# Altium PCB placa_adquisicion_ecg.PcbDoc
Units mm, origin at the board's own origin, x right, y up, seen from the top; angles counter-clockwise.
Board outline 152.4 x 101.6 mm, 2 copper layers (Top Layer, Bottom Layer); 45 components, 30 nets, 134 pads, 29 vias.
Unrouted connection lines stored in the file: 12.
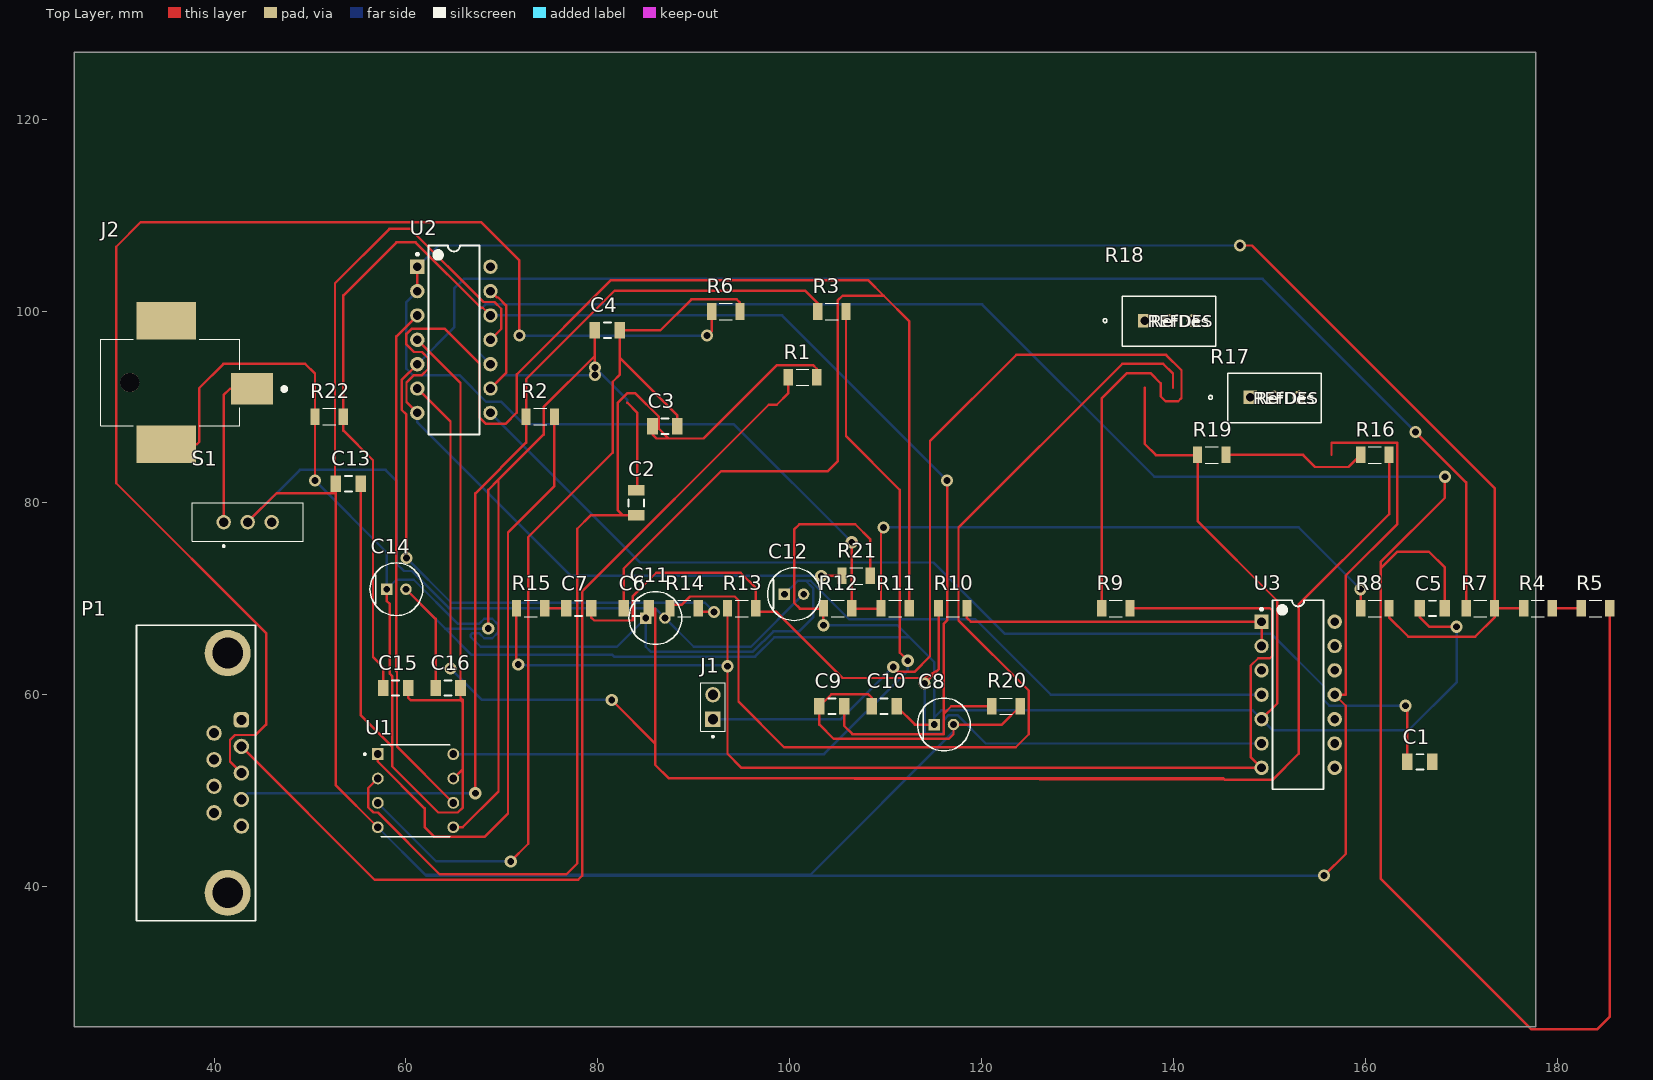
[diagram p0: Top Layer view]
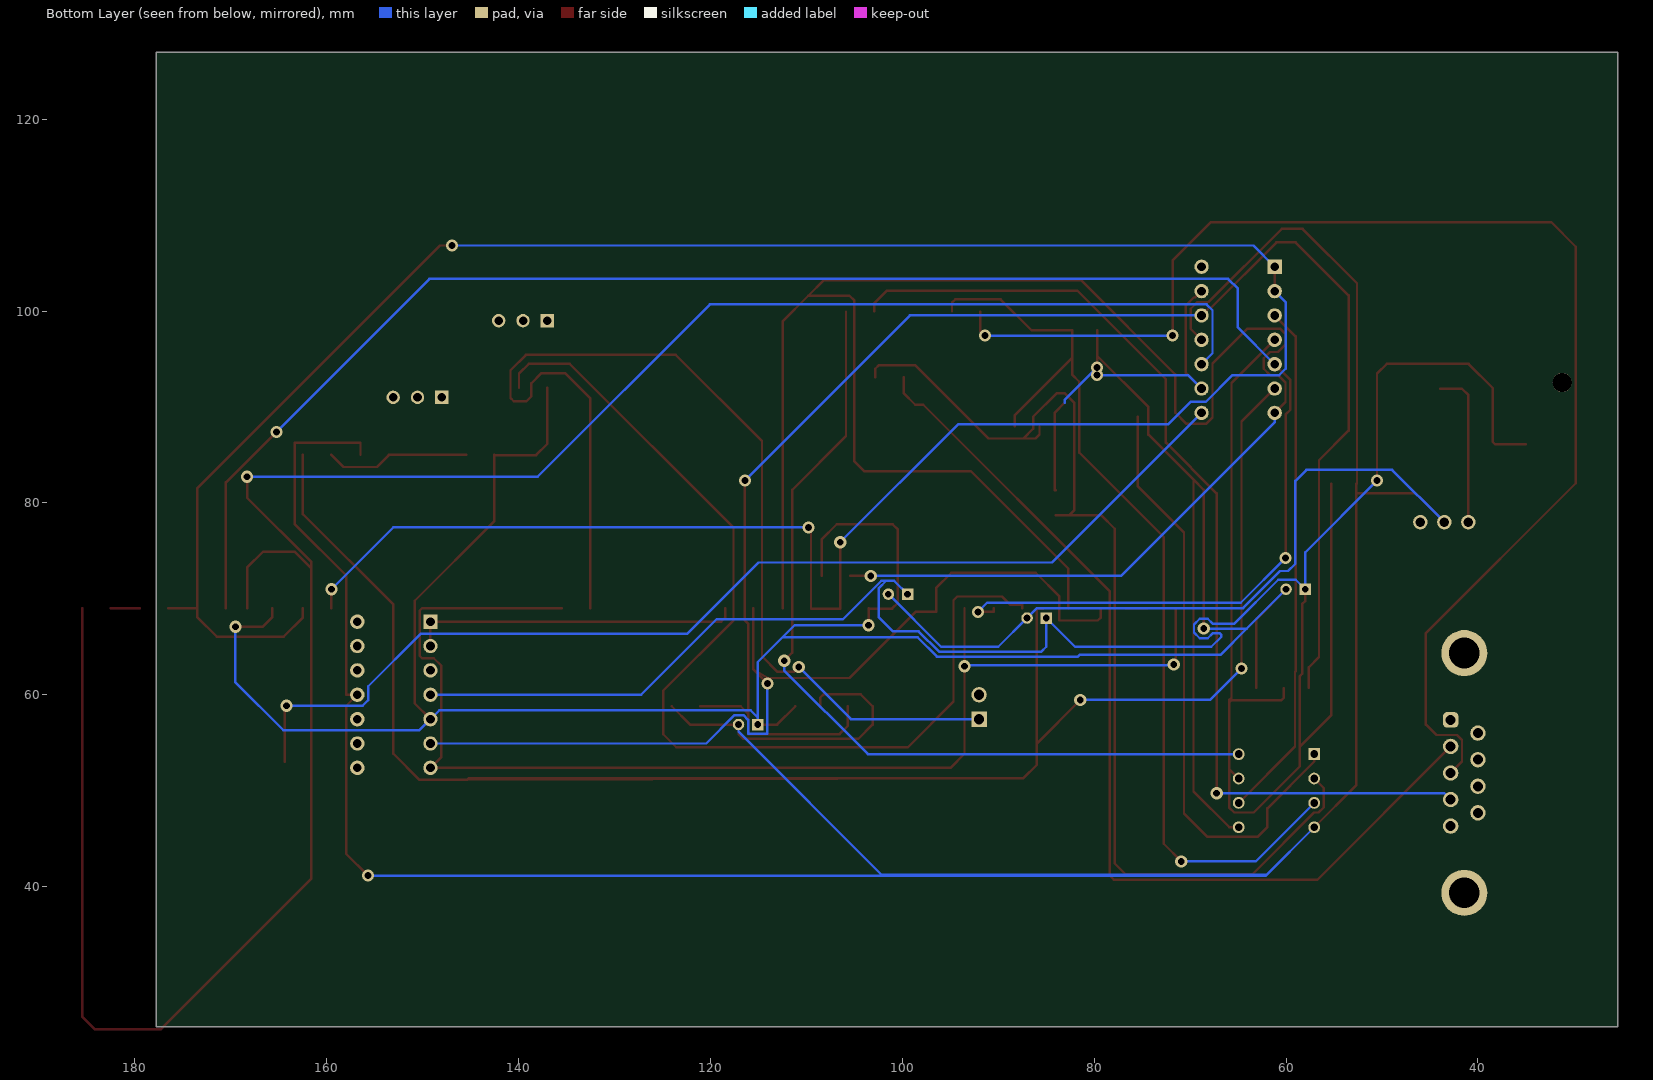
[diagram p1: Bottom Layer view, seen from below]
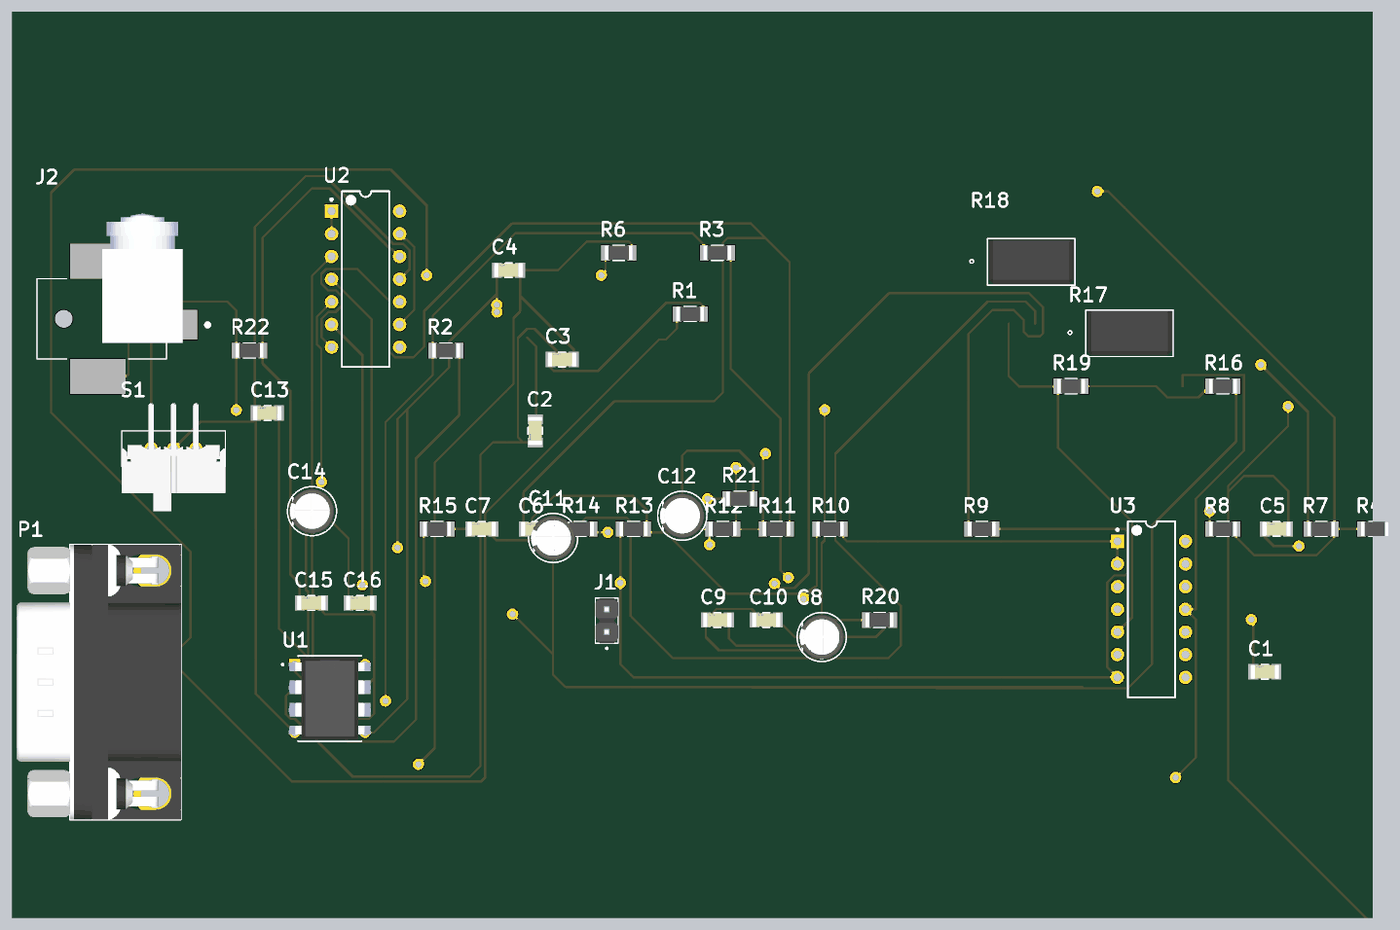
[diagram p2: 3D render of the assembled board from above, using the file's embedded part models]

## Layer stack, top to bottom
Top Solder: solder mask 0.0102, Solder Resist, Dk 3.5
Top Layer: signal copper 0.0356
Dielectric 1: dielectric 0.32, FR-4, Dk 4.8
Bottom Layer: signal copper 0.0356
Bottom Solder: solder mask 0.0102, Solder Resist, Dk 3.5

## Board outline
25.4,25.4 177.8,25.4 177.8,127 25.4,127

## Design rules (kind name [scope] priority, off if disabled: settings)
Clearance [All] p1: gap=0.254 ignorepadtopadclearanceinfootprint=FALSE except(0: Arc-Hole Track-Hole SMDPad-Hole THPad-Hole Via-Hole Fill-Hole Poly-Hole Region-Hole Text-Hole)
PolygonConnect [All] p1: connectstyle=Relief reliefconductorwidth=0.254 reliefentries=4 polygonreliefangle="90 Angle" airgapwidth=0.254
RoutingVias [All] p1: holewidth=0.711 width=1.27 viastyle="Through Hole" minholewidth=0.711 minwidth=1.27 maxholewidth=0.711 maxwidth=1.27
SolderMaskExpansion [All] p1: expansion=0.102 istentingtop=FALSE
Width [All] p1: maxlimit=0.7 minlimit=0.254 preferedwidth=0.6 toplayer_minwidth=0.5 bottomlayer_maxwidth=0.254 bottomlayer_prefwidth=0.254 minimp=50.000000 maximp=50.000000 favimp=50.000000
30 further rules are at their usual default settings.

## Components (designator, comment, footprint, x,y, rotation, side; value= is the part's Value field where it differs from the comment)
C1 "1 nF" C_1206_50V 165.699,53 r0 top value="100 pF"
C2 "100 pF" C_1206_50V 84,80 r90 top
C3 "4.7 nF" C_1206_50V 87,88 r0 top value="100 pF"
C4 "100 pF" C_1206_50V 81,98 r0 top
C5 "1 nF" C_1206_50V 167,69 r0 top value="100 pF"
C6 "4.7 nF" C_1206_50V 84,69 r0 top value="100 pF"
C7 "2 nF" C_1206_50V 78,69 r0 top value="100 pF"
C8 "10 uF 10V" C_DIP_100uF_16V 116.076,56.896 r0 top
C9 "100 nF 50V" C_1206_50V 104.392,58.801 r0 top value="100 pF"
C10 "100 nF 50V" C_1206_50V 109.853,58.801 r0 top value="100 pF"
C11 "100 uF 16V" C_DIP_100uF_16V 86,68 r0 top
C12 "100 uF 16V" C_DIP_100uF_16V 100.455,70.485 r0 top
C13 "100 nF 50V" C_1206_50V 54,82 r0 top value="100 pF"
C14 "10 uF 50V" C_DIP_100uF_16V 59,71 r0 top
C15 "100 nF 50V" C_1206_50V 58.926,60.706 r0 top value="100 pF"
C16 "100 nF 50V" C_1206_50V 64.387,60.706 r0 top value="100 pF"
J1 "M_HEADER_2" M_HEADER_2 92,58.73 r90 top
J2 "SMT_JACK_HEMBRA" SMT_JACK_HEMBRA 43.95,91.9 r0 top
P1 "618009231221" DIP_DB9M_90DEG 38.12,51.845 r270 top
R1 "100k" R_1206_0.25W 101.344,93.091 r0 top
R2 "1k" R_1206_0.25W 74,89 r0 top
R3 "1k" R_1206_0.25W 104.392,99.949 r0 top
R4 "1k" R_1206_0.25W 178,69 r0 top
R5 "1k" R_1206_0.25W 184,69 r0 top
R6 "100k" R_1206_0.25W 93.343,99.949 r0 top
R7 "100k" R_1206_0.25W 172,69 r0 top
R8 "100k" R_1206_0.25W 161,69 r0 top
R9 "100k" R_1206_0.25W 134,69 r0 top
R10 "10k" R_1206_0.25W 117,69 r0 top
R11 "10k" R_1206_0.25W 111,69 r0 top
R12 "10k" R_1206_0.25W 105,69 r0 top
R13 "10M" R_1206_0.25W 95,69 r0 top
R14 "1k" R_1206_0.25W 89,69 r0 top
R15 "10k" R_1206_0.25W 73,69 r0 top
R16 "1M" R_1206_0.25W 161,85 r0 top
R17 "100k" POT_TRIMMER 148,91 r0 top
R18 "10k" POT_TRIMMER 137,99 r0 top
R19 "1M" R_1206_0.25W 144,85 r0 top
R20 "100k 0.25W" R_1206_0.25W 122.553,58.801 r0 top
R21 "1k 0.25W" R_1206_0.25W 106.932,72.39 r0 top
R22 "100k 0.25W" R_1206_0.25W 52,89 r0 top
S1 "DIP_SWITCH_EG1218" DIP_SWITCH_EG128 43.5,78 r0 top
U1 "DIP_AD620AN" DIP_AD620AN 61,50 r0 top
U2 "TL084CN" DIP_TL084CN 65,97 r0 top
U3 "TL084CN" DIP_TL084CN 153,60 r0 top

## Footprints (in the part's own frame and the unit in brackets; to place one, negate y for a bottom-side part, rotate by r counter-clockwise, add the part's x,y. Pads: shape width x height; smd on the part's side, far side on the other; paste and mask are expansions set on the pad)
C_1206_50V [mm]
  rect 1.105x1.706 smd paste+0 mask+0: 1(-1.301,0) 2(1.301,0)
  silkscreen extent -0.37,-0.8 0.37,0.8, body extent -1.95,-1 1.95,1, height 0.25
C_DIP_100uF_16V [mm]
  rect 1.2x1.2 hole 0.7 paste-1000 mask+0: 1(-1,0)
  round 1.2 hole 0.7 paste-1000 mask+0: 2(1,0)
  silkscreen extent -2.75,-2.75 2.75,2.75, body extent -2.85,-2.85 2.85,2.85, height 0.25
DIP_AD620AN [mm]
  rect 1.23x1.23 hole 0.82: 1(-3.935,3.81)
  round 1.23 hole 0.82: 2(-3.935,1.27) 3(-3.935,-1.27) 4(-3.935,-3.81) 5(3.935,-3.81) 6(3.935,-1.27) 7(3.935,1.27) 8(3.935,3.81)
  silkscreen extent -5.38,-4.8 3.56,4.8, body extent -5.46,-4.64 5.46,4.64, height 5.33
DIP_DB9M_90DEG [mm] "9 pins, right angled, 8.08mm, with hex screw"
  rrect50% 1.6x1.6 hole 1.04: 1(-5.54,4.72)
  round 1.6 hole 1.04: 2(-2.77,4.72) 3(0,4.72) 4(2.77,4.72) 5(5.54,4.72) 6(-4.155,1.88) 7(-1.385,1.88) 8(1.385,1.88) 9(4.155,1.88)
  round 4.8 hole 3.2: M1(-12.5,3.3) M2(12.5,3.3)
  silkscreen extent -15.4,-6.2 15.4,6.2, body extent -15.4,-12.2 15.4,6.2, height 12.57
DIP_SWITCH_EG128 [mm]
  round 1.508 hole 1: 1(-2.5,0) 2(0,0) 3(2.5,0)
  silkscreen extent -5.8,-2.6 5.8,2, body extent -5.8,-7 5.8,5.1, height 2
DIP_TL084CN [mm] "DIP, 14-Leads, Body 19.7x6.6mm, Pitch 2.54mm"
  rect 1.5x1.5 hole 0.9: 1(-3.81,7.62)
  round 1.5 hole 0.9: 2(-3.81,5.08) 3(-3.81,2.54) 4(-3.81,0) 5(-3.81,-2.54) 6(-3.81,-5.08) 7(-3.81,-7.62) 8(3.81,-7.62) 9(3.81,-5.08) 10(3.81,-2.54) 11(3.81,0) 12(3.81,2.54) 13(3.81,5.08) 14(3.81,7.62)
  silkscreen extent -3.93,-9.85 2.65,9.85, body extent -3.95,-9.85 3.95,9.85, height 5.08
M_HEADER_2 [mm]
  rect 1.605x1.605 / inner round 1.605 / far side rect 1.605x1.605 hole 1.07: 1(-1.27,0)
  round 1.605 hole 1.07: 2(1.27,0)
  silkscreen extent -3.2,-1.27 2.54,1.27, body extent -2.54,-1.27 2.54,1.27, height 8.74
POT_TRIMMER [mil]
  rect 55x55 / inner round 60 / far side rect 55x55 hole 35 paste-27.5 mask+0: 1(0,0)
  round 55 / inner round 60 / far side round 55 hole 35 paste-27.5 mask+0: 2(100,0) 3(200,0)
  silkscreen extent -170,-105 292,100, body extent -87,-100 287,95, height 455
R_1206_0.25W [mm]
  rect 0.97x1.73 smd: 1(-1.48,0) 2(1.48,0)
  silkscreen extent -0.67,-0.85 0.67,0.85, body extent -1.55,-0.8 1.55,0.8, height 0.65
SMT_JACK_HEMBRA [mm]
  rect 4.4x3.3 smd: 1(0,0)
  rect 6.2x3.9 smd: 2(-8.95,7.1) 3(-8.95,-5.8)
  round 2 hole 2 unplated: ""(-12.75,0.65)
  silkscreen extent -15.75,-3.85 3.56,5.15, body extent -11.54,-2.03 3.66,15.07, height 4.5

## Part data
C1 C3 C5 C6 C7 C9 C10 C13 C15 C16: library part C_1206_50V, "Multilayer Ceramic Capacitor, C Series, 100 Pf, - 5%, C0g / Np0, 50 V, 1206 [3216 Metric]", Capacitance="100 pF", Manufacturer=KEMET, Manufacturer Part Number=C1206C101J5GACTU, Package=C1206C-EB, Temperature="-55°C to +150°C", Temperature Characteristic=C0G, Temperature Coefficient=15%, Temperature Range High=+150°C, Temperature Range Low=-55°C, Tolerance=0.05, Voltage Rating="50 V", Automotive=Yes, Automotive Grade="Grade 0", Category=Cap, ComponentLink2Description=Datasheet, ComponentLink2URL=https://content.kemet.com/datasheets/KEM_C1007_X8R_ULTRA_150C_SMD.pdf, Device Class L1="Passive Components", Device Class L2=Capacitors, Device Class L3="Ceramic Capacitors", Digikey Description="Multilayer Ceramic Capacitor, C Series, 100 Pf, - 5%, C0g / Np0, 50 V, 1206 [3216 Metric]", Height=0.88mm, Ipc Land Pattern Name=CAPC320160X78, Lead Free=Yes, Material=Ceramic, Mouser Description="Multilayer Ceramic Capacitors MLCC - SMD/SMT 50volts 100pF C0G 5%", Octopart=https://octopart.com/c1206c101j5gactu-kemet-102340, RoHS=TRUE
C2 C4: library part C_1206_50V, "Multilayer Ceramic Capacitor, C Series, 100 Pf, - 5%, C0g / Np0, 50 V, 1206 [3216 Metric]", Manufacturer=KEMET, Manufacturer Part Number=C1206C101J5GACTU, Package=C1206C-EB, Temperature="-55°C to +150°C", Temperature Characteristic=C0G, Temperature Coefficient=15%, Temperature Range High=+150°C, Temperature Range Low=-55°C, Tolerance=0.05, Voltage Rating="50 V", Automotive=Yes, Automotive Grade="Grade 0", Capacitance="100 pF", Category=Cap, ComponentLink2Description=Datasheet, ComponentLink2URL=https://content.kemet.com/datasheets/KEM_C1007_X8R_ULTRA_150C_SMD.pdf, Device Class L1="Passive Components", Device Class L2=Capacitors, Device Class L3="Ceramic Capacitors", Digikey Description="Multilayer Ceramic Capacitor, C Series, 100 Pf, - 5%, C0g / Np0, 50 V, 1206 [3216 Metric]", Height=0.88mm, Ipc Land Pattern Name=CAPC320160X78, Lead Free=Yes, Material=Ceramic, Mouser Description="Multilayer Ceramic Capacitors MLCC - SMD/SMT 50volts 100pF C0G 5%", Octopart=https://octopart.com/c1206c101j5gactu-kemet-102340, RoHS=TRUE
C8 C11 C12 C14: library part C_DIP_100uF_16V, "Aluminum Electrolytic Capacitors (Radial Lead Type) AEC-Q200 Qualified 100uF ±20% 16V", Capacitance=100uF, Case/Package=Radial, Max Operating Temperature=105°C, Min Operating Temperature=-55°C, Package Quantity=200, Ripple Current=110mA, Tolerance=20%, Voltage=16V, Construction=RADIAL, Diameter=5mm, Height=11mm, Height - Seated (Max)=0.492inch, Lead Diameter=0.5mm, Lead Free="Lead Free", Lead Pitch=2.5mm, Lead/Base Style=Straight, Length=11mm, Life (Hours)=1000Hour, Mount="Through Hole", Number of Pins=2, Packaging=Bulk, Polarity=Polar, REACH SVHC="No SVHC", Ripple Current (AC)=110mA, RoHS Compliant=Yes, Series=HD, Termination=Radial, Voltage Rating=16V, Voltage Rating (DC)=16V
J1: "2.54mm (0.1) Pitch SIL Vertical Throughboard Pin Header, 6.1mm mating pin height, tin, 2 contacts", Package=None, Check_prices=https://www.snapeda.com/parts/M20-9990246/Harwin/view-part/?ref=eda, MF=Harwin, MP=M20-9990246, SnapEDA_Link=https://www.snapeda.com/parts/M20-9990246/Harwin/view-part/?ref=snap
J2: "2.0 x 6.3 mm, 5.0 A, Horizontal, Surface Mount (SMT), Dc Power Jack Connector", Package=None, Check_prices=https://www.snapeda.com/parts/PJ-036AH-SMT-TR/Same+Sky/view-part/?ref=eda, MF="Same Sky", MP=PJ-036AH-SMT-TR, SnapEDA_Link=https://www.snapeda.com/parts/PJ-036AH-SMT-TR/Same+Sky/view-part/?ref=snap
P1: library part DIP_DB9M_90DEG, Contact Resistance=30mΩ, Current Rating=3A, Insulation Resistance=5GΩ, Max Operating Temperature=105°C, Min Operating Temperature=-55°C, Operating Supply Voltage=125V, Contact Material=Gold, Contact Plating=Gold, Depth=18.5mm, Gender=Male, Height=12.7mm, Housing Material=Steel, Insulation Material=PBT, Length=30.8mm, Mount="Through Hole", NexarPartId=22865742, Number of Contacts=9, Number of Pins=9, Number of Rows=2, Orientation="Right Angle", Pitch=2.77mm, REACH SVHC=Unknown, RoHS=Compliant, Termination=SMD/SMT, Voltage Rating=125V, Width=12.5mm
R1 R2 R3 R4 R5 R6 R7 R8 R9 R10 R11 R12 R13 R14 R15 R16 R19 R20 R21 R22: library part R_1206_0.25W, "10 kOhms Â±1% 0.25W, 1/4W Chip Resistor 1206 (3216 Metric) Moisture Resistant Thick Film", Package="3116 Yageo", Availability="In Stock", Check_prices=https://www.snapeda.com/parts/RC1206FR-0710KL/Yageo/view-part/?ref=eda, MF=Yageo, MP=RC1206FR-0710KL, Price=None, Purchase-URL=https://pricing.snapeda.com/search?q=RC1206FR-0710KL&ref=eda, SnapEDA_Link=https://www.snapeda.com/parts/RC1206FR-0710KL/Yageo/view-part/?ref=snap
R17 R18: library part POT_TRIMMER, "Description", Manufacturer_Name="Bourns Electronics", Manufacturer_Part_Number=PV36W104C01B00, Copyright="Copyright (C) 2025 Ultra Librarian. All rights reserved.", Type="Trimmer Potentiometers"
S1: library part DIP_SWITCH_EG128, "Slide Switch, EG Series, SPDT, Non-Shorting, ON-ON, 200mA DC, 30VDC, PC Pin", Package=None, Check_prices=https://www.snapeda.com/parts/EG1218/E-Switch/view-part/?ref=eda, MF=E-Switch, MP=EG1218, SnapEDA_Link=https://www.snapeda.com/parts/EG1218/E-Switch/view-part/?ref=snap
U1: "Instrumentation Amplifier 1 Circuit - 8-PDIP", Package="PDIP-8 Linear Technology", Availability="In Stock", Check_prices=https://www.snapeda.com/parts/AD620AN/Analog+Devices+Inc./view-part/?ref=eda, MF="Analog Devices", MP=AD620AN, Price=None, Purchase-URL=https://pricing.snapeda.com/search/part/AD620AN/?ref=eda, SnapEDA_Link=https://www.snapeda.com/parts/AD620AN/Analog+Devices+Inc./view-part/?ref=snap
U2 U3: library part DIP_TL084CN, "JFET-Input Operational Amplifier, 7 to 36 V, 0 to 70 degC, 14-pin DIP (N14), Pb-Free (RoHS)", Manufacturer="Texas Instruments", Rating=Catalog, Total Supply Voltage(Max)(+5V is 5, +/-5V is 10)=36, Total Supply Voltage(Min)(+5V is 5, +/-5V is 10)=7, CMRR(Min)(dB)=70, Code_JEDEC=MS-001, ComponentLink1Description="Manufacturer URL", ComponentLink1URL=http://www.ti.com/, ComponentLink2Description=Datasheet, ComponentLink2URL=http://www.ti.com/lit/ds/symlink/tl084.pdf, ComponentLink3Description="Package Specification", ComponentLink3URL=http://www.ti.com/lit/ml/mpdi002c/mpdi002c.pdf, DatasheetVersion=SLOS081G, Eco-Plan="Pb-Free (RoHS)", GBW(Typ)(MHz)=3, IIB(Max)(pA)=400, Iq per channel(Max)(mA)=2.8, Mounting Technology="Through Hole", Number of Channels=4, Offset Drift(Typ)(uV/C)=18, PackageDescription="14-Pin Plastic In-Line, Body 19.305 x 6.35 mm, Pitch 2.54 mm", PackageReference=N0014A, PackageVersion="4040049/E, 12/2002", PartNumber=TL084CN, Slew Rate(Typ)(V/us)=13, Sub Family="General Purpose Amplifier, High Supply Voltage Amplifier (>=30V)", Vio (25C)(Max)(mV)=15, Vn at 1kHz(Typ)(nV/rtHz)=18

## Via types
v1: diameter 1.27, hole 0.711, Top Layer to Bottom Layer, 29 vias

## Nets (pads, with @x,y where several pads share a name; then routed paths per layer and width w, separated by ;. In a path a pad name is that pad's centre, name@x,y a point inside that pad or via, vN(x,y) a via of type N, cw(c..) or ccw(c..) an arc to the next point about the centre after c; other vN are vias at no path point)
+5: C8.2 C9.1 C10.1 C11.2 C12.2 C13.1 R17.2 R20.2 S1.2 U1.4 U2.4 U3.11 | length 424.3
  Top Layer w0.254: S1.2 46.526,81.026 52.699,81.026 ; U1.4 52.699,50.556 52.699,81.026 ; 68.81,97 69.941,98.131 69.941,100.239 69.24,100.94 68.072,100.94 60.452,108.56 58.268,108.56 52.603,102.895 52.603,82 C13.1 52.699,81.026 ; C10.1 108.552,59.697 108.204,60.046 104.336,60.046 C9.1 103.091,56.896 104.59,55.397 116.586,55.397 117.076,55.887 C8.2 122.128,56.896 R20.2 ; v1(155.702,41.148) 157.963,43.409 157.963,58.848 U3.11 157.963,60 157.963,72.415 163.347,77.8 163.347,86.258 156.48,86.258 156.48,85
  Bottom Layer w0.254: S1.2 48.939,83.439 57.887,83.439 59.03,82.296 59.03,73.66 59.792,72.898 60.613,72.898 64.474,69.037 85.963,69.037 C11.2 90,65 95.97,65 C12.2 ; U1.4 62.031,41.224 ; C8.2 117.076,56.151 102.149,41.224 62.031,41.224 ; v1(155.702,41.148) 62.107,41.148 62.031,41.224
-5: C11.1 C12.1 C13.2 C14.1 C15.2 C16.2 J2.3 R22.1 U1.7 U2.11 U3.4 | length 286.9
  Top Layer w0.254: J2.3 38.196,86.1 38.456,86.36 38.456,91.973 40.97,94.488 49.504,94.488 50.52,93.472 R22.1 v1(50.52,82.322) ; C13.2 55.301,57.856 58.547,54.61 58.547,52.553 58.559,52.541 ; C14.1 58,69.762 58.318,69.444 58.318,62.191 58.559,61.951 58.559,52.541 ; C15.2 60.227,59.69 60.481,59.436 65.688,59.436 ; 61.19,97 65.688,92.502 C16.2 65.688,59.687 ; U1.7 65.938,52.273 ; 58.559,52.541 63.373,47.727 65.405,47.727 65.938,48.26 65.938,52.273 ; 65.688,59.436 65.688,59.687 ; 65.688,59.436 65.938,59.185 ; 65.688,59.687 65.938,59.436 65.938,59.185 ; 65.938,52.273 65.938,59.185
  Bottom Layer w0.254: v1(50.52,82.322) 58,74.842 C14.1 58.984,71.984 60.809,71.984 65.381,67.412 67.651,67.412 68.159,67.92 69.001,67.92 69.596,67.324 69.596,66.483 69.001,65.888 68.159,65.888 67.651,66.396 66.905,66.396 66.756,66.247 66.756,66.036 67.792,65 82,65 C11.1 85,65 85.508,64.492 96.18,64.492 98.299,66.611 100.977,66.611 102.438,68.072 102.438,71.12 101.676,71.882 ; C12.1 100.852,71.882 101.676,71.882 ; U3.4 127.223,60 119.355,67.869 106.197,67.869 102.184,71.882 101.676,71.882
GND: C2.2 C4.1 C5.1 C8.1 C10.2 C14.2 C16.1 R12.1 R18.1 R19.1 R21.2 U1.5 U2.9 U2.13 U3.5 | length 348.4
  Top Layer w0.254: C14.2 63.086,67.914 C16.1 ; U1.5 65.913,46.19 69.647,49.924 69.647,82.423 ; v1(68.58,66.904) 68.58,81.356 69.647,82.423 ; U2.9 70.449,93.559 70.449,100.584 69.621,101.412 69.478,101.412 U2.13 ; C4.1 79.699,95.346 ; v1(79.705,93.32) 79.699,93.326 v1(79.699,94.113) 79.699,95.346 ; 83.083,90.438 84.099,89.422 84.099,81.301 C2.2 ; v1(103.52,67.244) R12.1@103.52,68.986 ; R12.1 R12.1@103.52,68.986 ; R21.2 108.412,76.2 106.837,77.775 101.016,77.775 100.457,77.216 100.457,69.596 101.067,68.986 R12.1@103.52,68.986 ; C10.2 113.059,56.896 C8.1 ; 137,92 137,86.164 138.176,84.988 R19.1@142.52,84.988 ; R19.1 R19.1@142.52,84.988 ; U3.5 150.829,59.099 150.829,69.795 142.52,78.104 R19.1@142.52,84.988 ; C5.1 165.699,68.072 166.69,67.081 v1(169.52,67.081) ; 69.647,82.423 74.346,87.122 74.346,89.992 79.699,95.346
  Bottom Layer w0.254: C14.2 64.096,66.904 ; v1(68.58,66.904) 64.096,66.904 ; U2.9 70.21,93.32 v1(79.705,93.32) ; v1(79.699,94.113) 83.083,90.729 83.083,90.438 ; v1(103.52,67.244) 111.242,67.244 112.486,66 ; C8.1 115.076,57.637 ; v1(169.52,67.081) 169.52,61.29 164.541,56.312 150.338,56.312 U3.5 148.265,58.385 115.824,58.385 115.076,57.637 ; 64.096,66.904 66.84,64.16 81.527,64.16 81.703,63.984 96.391,63.984 98.407,66 112.486,66 ; 112.486,66 115.076,63.41 115.076,57.637
NetC1_1: C1.1 U2.8 | length 114.8
  Top Layer w0.254: v1(164.186,58.852) 164.398,58.639 C1.1
  Bottom Layer w0.254: U2.8 84.403,73.787 115.011,73.787 122.453,66.345 150.216,66.345 155.677,60.884 155.677,59.436 156.261,58.852 v1(164.186,58.852)
NetC1_2: C1.2 R4.2 R5.1 | length 3
  Top Layer w0.254: R4.2 R5.1
NetC2_1: C2.1 C3.1 R1.2 U1.2 | length 112.9
  Top Layer w0.254: U1.2 56.069,50.274 56.069,48.26 56.602,47.727 57.074,47.727 63.525,41.275 76.708,41.275 77.86,42.427 77.86,77.311 79.248,78.699 82.616,78.699 ; C2.1 82.616,78.699 ; C3.1 85.699,87.122 86.106,86.716 87.376,86.716 ; R1.2 102.824,93.98 102.443,94.361 98.679,94.361 91.034,86.716 87.376,86.716 ; 82.616,78.699 82.067,79.248 82.067,90.424 83.083,91.44 83.896,91.44 86.36,88.976 86.36,87.732 87.376,86.716
NetC3_2: C3.2 C4.2 R6.2 U1.3 | length 101
  Top Layer w0.254: v1(70.917,42.634) 72.746,44.463 72.746,76.429 81.559,85.242 81.559,92.634 82.301,93.375 82.301,95.123 ; C4.2 C4.2@82.301,97.993 ; C3.2 88.301,89.123 82.301,95.123 ; R6.2 94.823,100.884 94.488,101.219 89.764,101.219 86.538,97.993 C4.2@82.301,97.993 ; 82.301,95.123 C4.2@82.301,97.993
  Bottom Layer w0.254: U1.3 63.161,42.634 v1(70.917,42.634)
NetC5_2: C5.2 R5.2 U2.10 | length 245
  Top Layer w0.254: C5.2 168.301,73.253 166.624,74.93 163.373,74.93 161.595,73.152 ; v1(168.3,82.728) 168.3,80.543 161.595,73.838 161.595,73.152 ; R5.2 185.48,26.416 184.21,25.146 177.292,25.146 161.595,40.843 161.595,73.152
  Bottom Layer w0.254: U2.10 67.666,95.604 67.666,100.076 68.275,100.686 120.066,100.686 138.024,82.728 v1(168.3,82.728)
NetC6_1: C6.1 R11.2 U2.7 | length 164.7
  Top Layer w0.254: U2.7 60.059,90.511 60.059,92.546 60.833,93.32 61.661,93.32 62.321,93.98 62.321,95.083 61.671,95.733 60.833,95.733 60.046,96.52 60.046,97.612 60.579,98.146 64.059,98.146 67.666,94.539 67.666,88.9 68.326,88.24 70.383,88.24 71.552,89.408 71.552,93.396 81.382,103.226 108.179,103.226 109.804,101.6 ; C6.1 82.699,73.149 92.862,83.312 103.988,83.312 105.004,84.328 105.004,101.092 105.512,101.6 109.804,101.6 ; R11.2 112.48,98.924 109.804,101.6
NetC6_2: C6.2 R16.2 U2.6 | length 234
  Top Layer w0.254: U2.6 64.643,88.467 v1(64.643,62.738) ; v1(81.458,59.461) 85.981,54.938 ; C6.2 85.301,68.986 85.981,68.986 85.981,54.938 ; R16.2 162.48,78.816 153.06,69.397 153.06,53.848 150.368,51.156 145.339,51.156 ; 85.981,54.938 85.981,52.703 87.376,51.308 ; 87.376,51.308 145.339,51.156 ; 87.376,51.308 145.186,51.308 145.339,51.156
  Bottom Layer w0.254: v1(64.643,62.738) 67.92,59.461 v1(81.458,59.461)
NetC7_1: C7.1 R15.2 | length 2.2
  Top Layer w0.254: R15.2 C7.1
NetC7_2: C7.2 R10.1 R13.2 U3.6 | length 98.8
  Top Layer w0.254: C7.2 79.301,68.072 79.631,67.742 83.633,67.742 83.633,70.256 86.097,72.72 94.88,72.72 96.48,71.12 R13.2 96.48,68.631 98.628,68.631 105.512,61.747 114.046,61.747 115.52,62.637 ; v1(114.046,61.163) 115.52,62.637 ; R10.1 115.52,62.637
  Bottom Layer w0.254: v1(114.046,61.163) 114.071,61.138 114.071,55.915 116.057,55.915 116.078,55.936 116.078,57.387 116.568,57.877 117.485,57.877 120.442,54.92 U3.6
NetC9_2: C9.2 C15.1 R20.1 R22.2 U2.12 | length 162.8
  Top Layer w0.254: C15.1 57.625,62.872 56.566,63.932 56.566,84.443 53.48,87.528 R22.2 53.48,101.638 59.004,107.163 61.001,107.163 67.822,100.342 68.008,100.342 U2.12 ; C9.2 105.693,56.744 106.531,55.905 116.078,55.905 116.078,58.039 ; v1(116.408,82.347) 116.408,67.742 116.078,67.412 116.078,58.039 ; R20.1 116.84,58.801 116.078,58.039
  Bottom Layer w0.254: U2.12 99.215,99.54 v1(116.408,82.347)
NetJ1_1: J1.1 R9.1 | length 115.1
  Top Layer w0.254: v1(110.79,62.89) 111.298,62.382 113.005,62.382 114.63,64.008 114.63,86.436 123.622,95.428 139.243,95.428 140.843,93.828 140.843,90.932 140.513,90.602 139.192,90.602 138.684,91.11 138.684,92.456 137.617,93.523 135.179,93.523 132.52,90.864 R9.1
  Bottom Layer w0.254: J1.1 105.359,57.46 v1(110.79,62.89)
NetJ1_2: J1.2 P1.4
NetJ2_1: J2.1 S1.1 | length 16.5
  Top Layer w0.254: S1.1 41,91.244 41.656,91.9 J2.1
NetP1_2: P1.2 R1.1 | length 102.8
  Top Layer w0.254: P1.2 56.739,40.716 77.953,40.716 78.368,41.131 78.368,70.773 97.823,90.229 98.653,90.229 99.864,91.44 R1.1
NetP1_3: P1.3 R6.1 | length 139.5
  Top Layer w0.254: P1.3 41.656,53.029 41.656,55.296 42.164,55.804 44.323,55.804 45.415,56.896 45.415,66.421 29.794,82.042 29.794,106.705 32.36,109.271 67.818,109.271 71.831,105.258 v1(71.831,97.434) ; v1(91.389,97.434) 91.863,97.908 R6.1
  Bottom Layer w0.254: v1(71.831,97.434) v1(91.389,97.434)
NetR2_1: R2.1 R3.1 U3.3
NetR2_2: R2.2 U1.1 | length 63.1
  Top Layer w0.254: U1.1 57.065,53.044 61.947,48.162 61.947,46.231 62.992,45.187 68.199,45.187 70.637,47.625 70.637,76.911 75.48,81.754 R2.2
NetR3_2: R3.2 U1.8 | length 91.1
  Top Layer w0.254: R3.2 105.872,86.965 111.481,81.356 111.481,64.389 v1(112.319,63.551)
  Bottom Layer w0.254: U1.8 103.594,53.81 112.319,62.535 v1(112.319,63.551)
NetR4_1: R4.1 R7.2 R8.2 U2.1 | length 153.8
  Top Layer w0.254: v1(146.939,106.832) 148.183,106.832 173.48,81.535 R7.2 ; R8.2 162.48,68.072 164.487,66.065 171.474,66.065 173.48,68.072 R7.2 ; R4.1 R7.2
  Bottom Layer w0.254: U2.1 63.402,106.832 v1(146.939,106.832)
NetR7_1: R7.1 R14.2 U2.5 | length 194.8
  Top Layer w0.254: v1(60.046,74.27) 60.046,89.209 59.551,89.704 59.551,92.821 U2.5 ; R14.2 90.48,68.631 v1(92.126,68.631) ; v1(165.252,87.401) 170.52,82.134 R7.1
  Bottom Layer w0.254: v1(60.046,74.27) 64.719,69.596 91.161,69.596 v1(92.126,68.631) ; U2.5 65.024,98.294 65.024,102.337 66.04,103.353 149.301,103.353 v1(165.252,87.401)
NetR8_1: R8.1 R11.1 R12.2 U2.2 | length 135.4
  Top Layer w0.254: v1(106.48,75.892) R12.2 106.48,68.986 109.52,68.986 R11.1 109.52,77.186 v1(109.779,77.445) ; R8.1 v1(159.52,70.993)
  Bottom Layer w0.254: U2.2 60.046,100.936 60.046,93.98 60.706,93.32 65.583,93.32 68.377,90.526 69.952,90.526 72.288,88.189 94.183,88.189 v1(106.48,75.892) ; v1(109.779,77.445) 153.069,77.445 v1(159.52,70.993)
NetR9_2: R9.2 R13.1 R15.1 U3.7 | length 132.7
  Top Layer w0.254: R15.1 71.52,63.328 v1(71.704,63.144) ; R13.1 93.52,63.144 93.52,53.848 94.993,52.375 147.904,52.375 147.909,52.38 U3.7 148.057,53.514 148.057,63.017 148.844,63.805 150.063,63.805 150.321,64.063 150.321,68.751 150.06,69.012 135.48,69.012 R9.2
  Bottom Layer w0.254: v1(71.704,63.144) 71.792,63.056 93.432,63.056 v1(93.52,62.968)
NetR10_2: R10.2 U3.1 U3.2 | length 34.4
  Top Layer w0.254: R10.2 118.48,68.012 118.872,67.62 U3.1 U3.2
NetR14_1: R14.1 R18.2 | length 107.3
  Top Layer w0.254: R14.1 87.52,69.367 88.735,69.367 89.614,70.246 94.27,70.246 94.666,69.85 94.666,59.284 99.416,54.534 123.571,54.534 124.917,55.88 124.917,60.427 117.602,67.742 117.602,77.419 134.671,94.488 138.944,94.488 139.96,93.472 139.96,92
NetR16_1: R16.1 R17.1 R19.2 | length 15.1
  Top Layer w0.254: R19.2 153.52,85 154.776,83.744 158.264,83.744 R16.1
NetR21_1: R21.1 U2.14
NetU1_6: U1.6 U2.3 | length 54.2
  Top Layer w0.254: U2.3 59.004,97.354 59.004,62.448 59.067,62.386 59.067,54.598 U1.6
pads on no net: J2. J2.2 P1.1 P1.5 P1.6 P1.7 P1.8 P1.9 P1.M1 P1.M2 R17.3 R18.3 S1.3 U3.8 U3.9 U3.10 U3.12 U3.13 U3.14
copper on no net: | length 160.1
  Top Layer w0.254: 61.19,102.08 61.19,104.62 ; v1(67.234,49.733) 67.234,80.998 72.52,86.284 72.52,89 72.52,92.891 81.763,102.133 101.6,102.133 102.912,100.821 102.912,99.949 ; v1(103.302,72.39) 105.452,72.39
  Bottom Layer w0.254: 42.84,49.075 43.498,49.733 v1(67.234,49.733) ; 61.19,89.38 61.19,88.392 77.192,72.39 v1(103.302,72.39)

## Text inside footprints (layer, text, board x,y; h text height)
P1: Top 3D Body "PCB Edge" at 30.3,55.245 h1.02 r270
R17: Mechanical 13 "RefDes2" at 148.318,90.299 h1.27; Top Overlay "RefDes" at 148.635,90.299 h1.27; Top Overlay "REFDES" at 148.318,90.299 h1.27
R18: Mechanical 13 "RefDes2" at 139.52,103 h1.27; Top Overlay "RefDes" at 137.635,98.299 h1.27; Top Overlay "REFDES" at 137.318,98.299 h1.27